# Altium PCB PCB.pcbdoc (part 1 of 2)
Units mil, origin at the board's own origin, x right, y up, seen from the top; angles counter-clockwise.
Board outline 16070 x 6016.88 mil, 4 copper layers (Top Layer, Inner1, Inner2, Bottom Layer); 148 components, 84 nets, 392 pads, 235 vias.
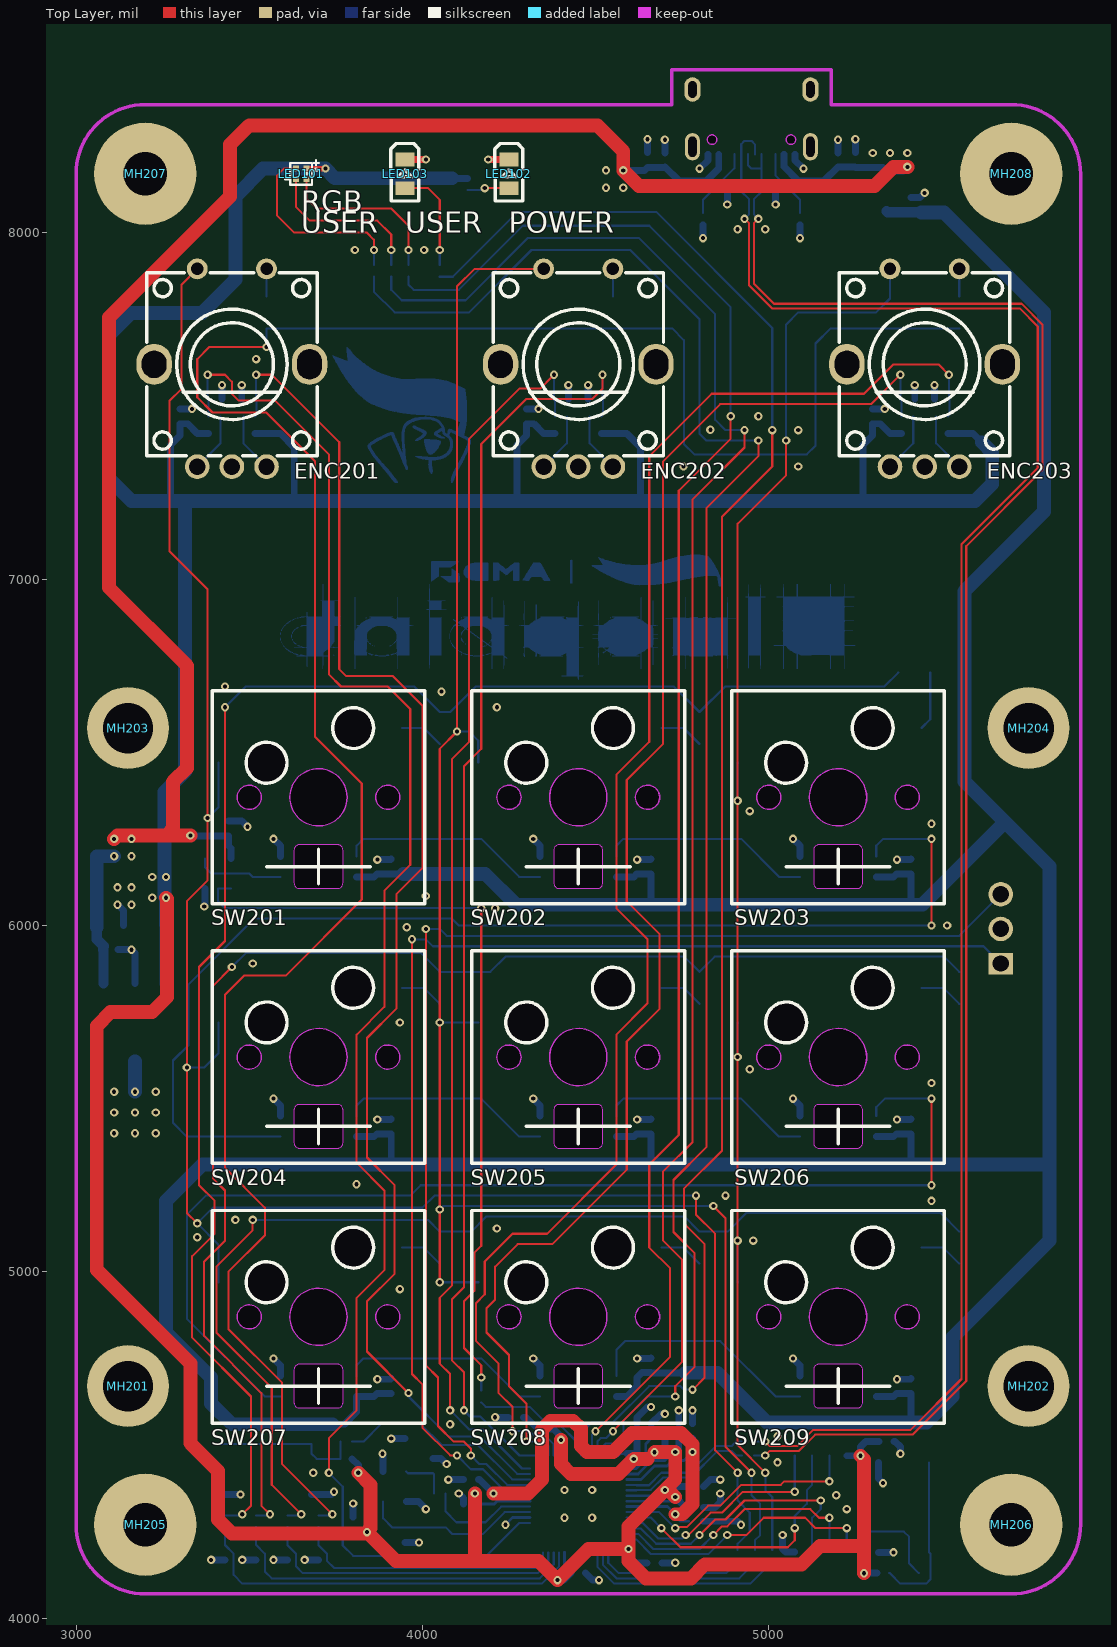
[diagram p0: Top Layer view]
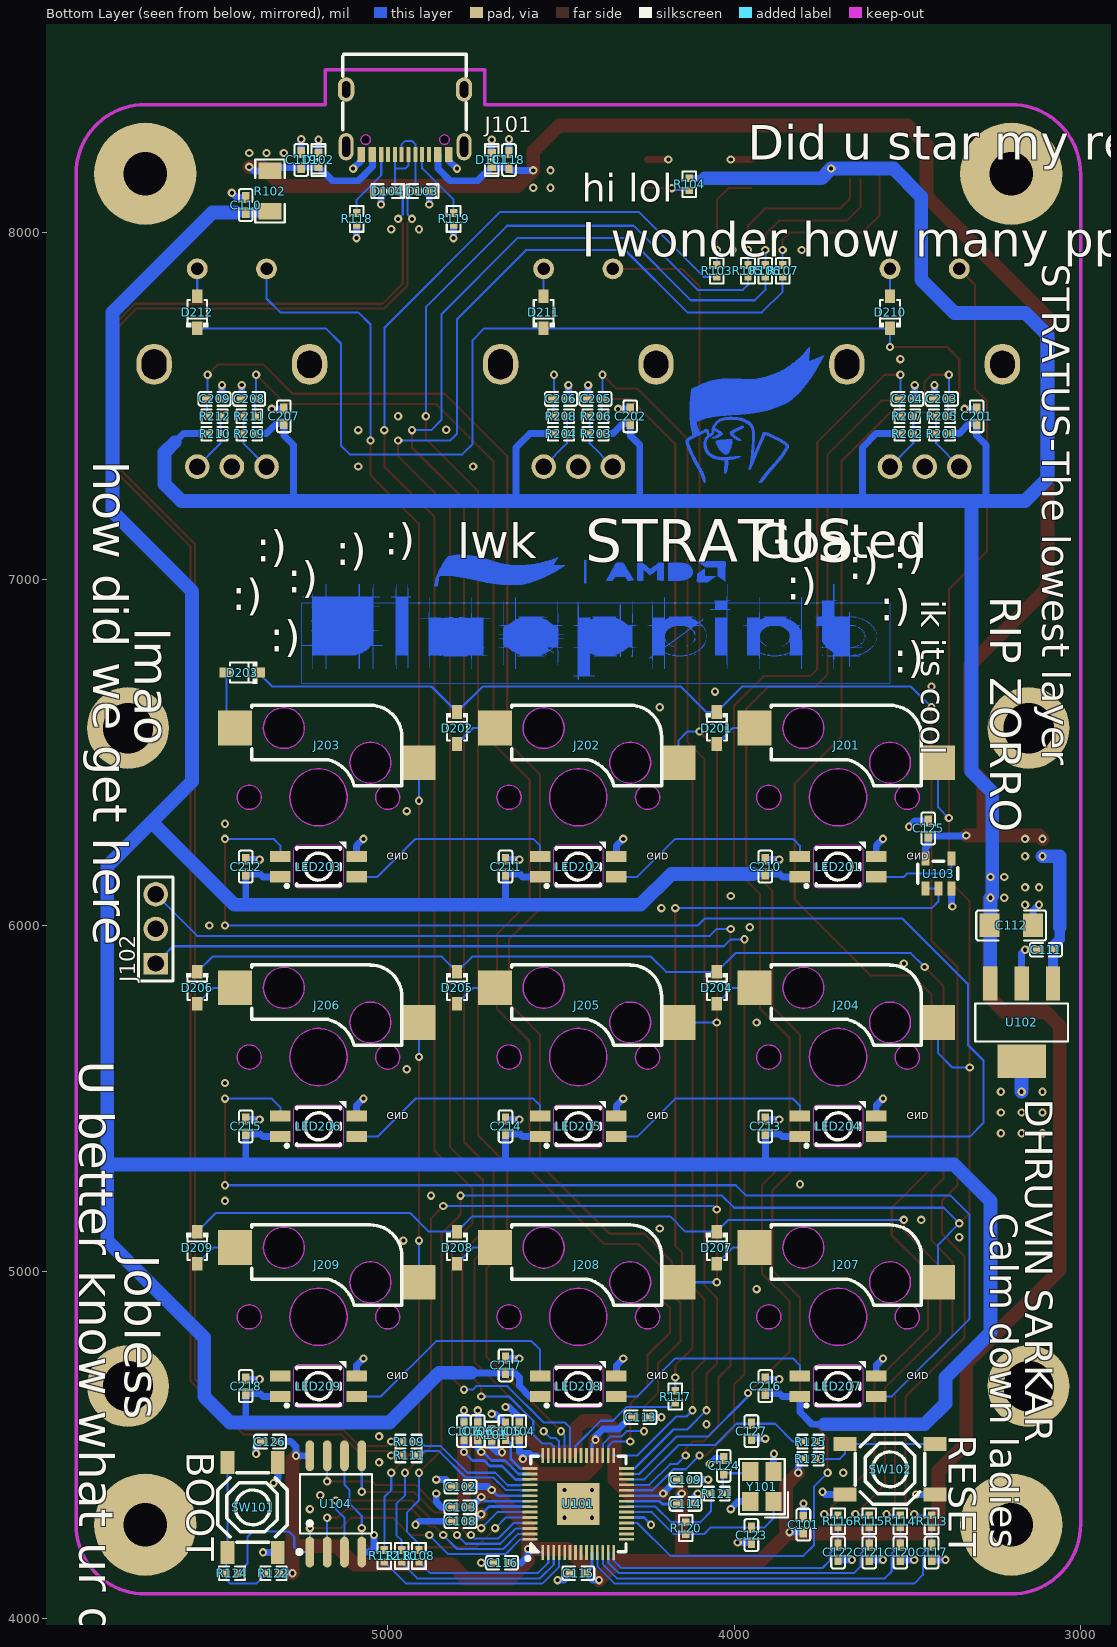
[diagram p1: Bottom Layer view, seen from below]
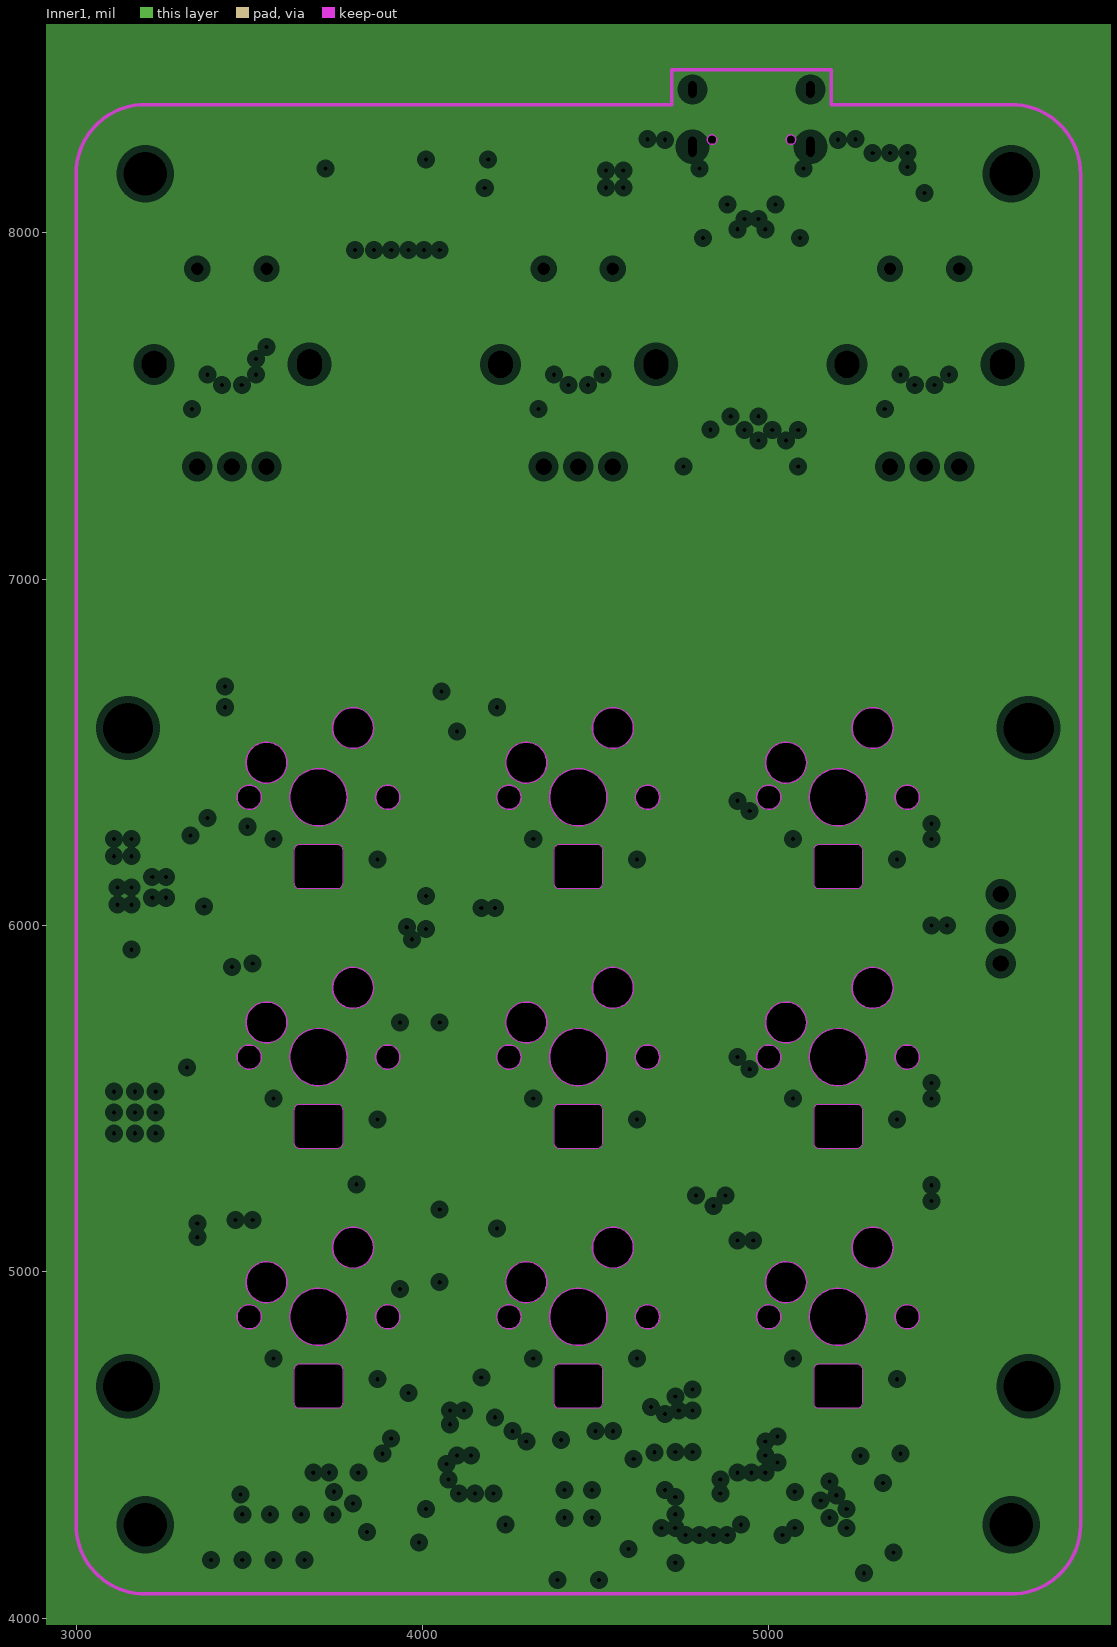
[diagram p2: Inner1, clearances drawn from the general rule]
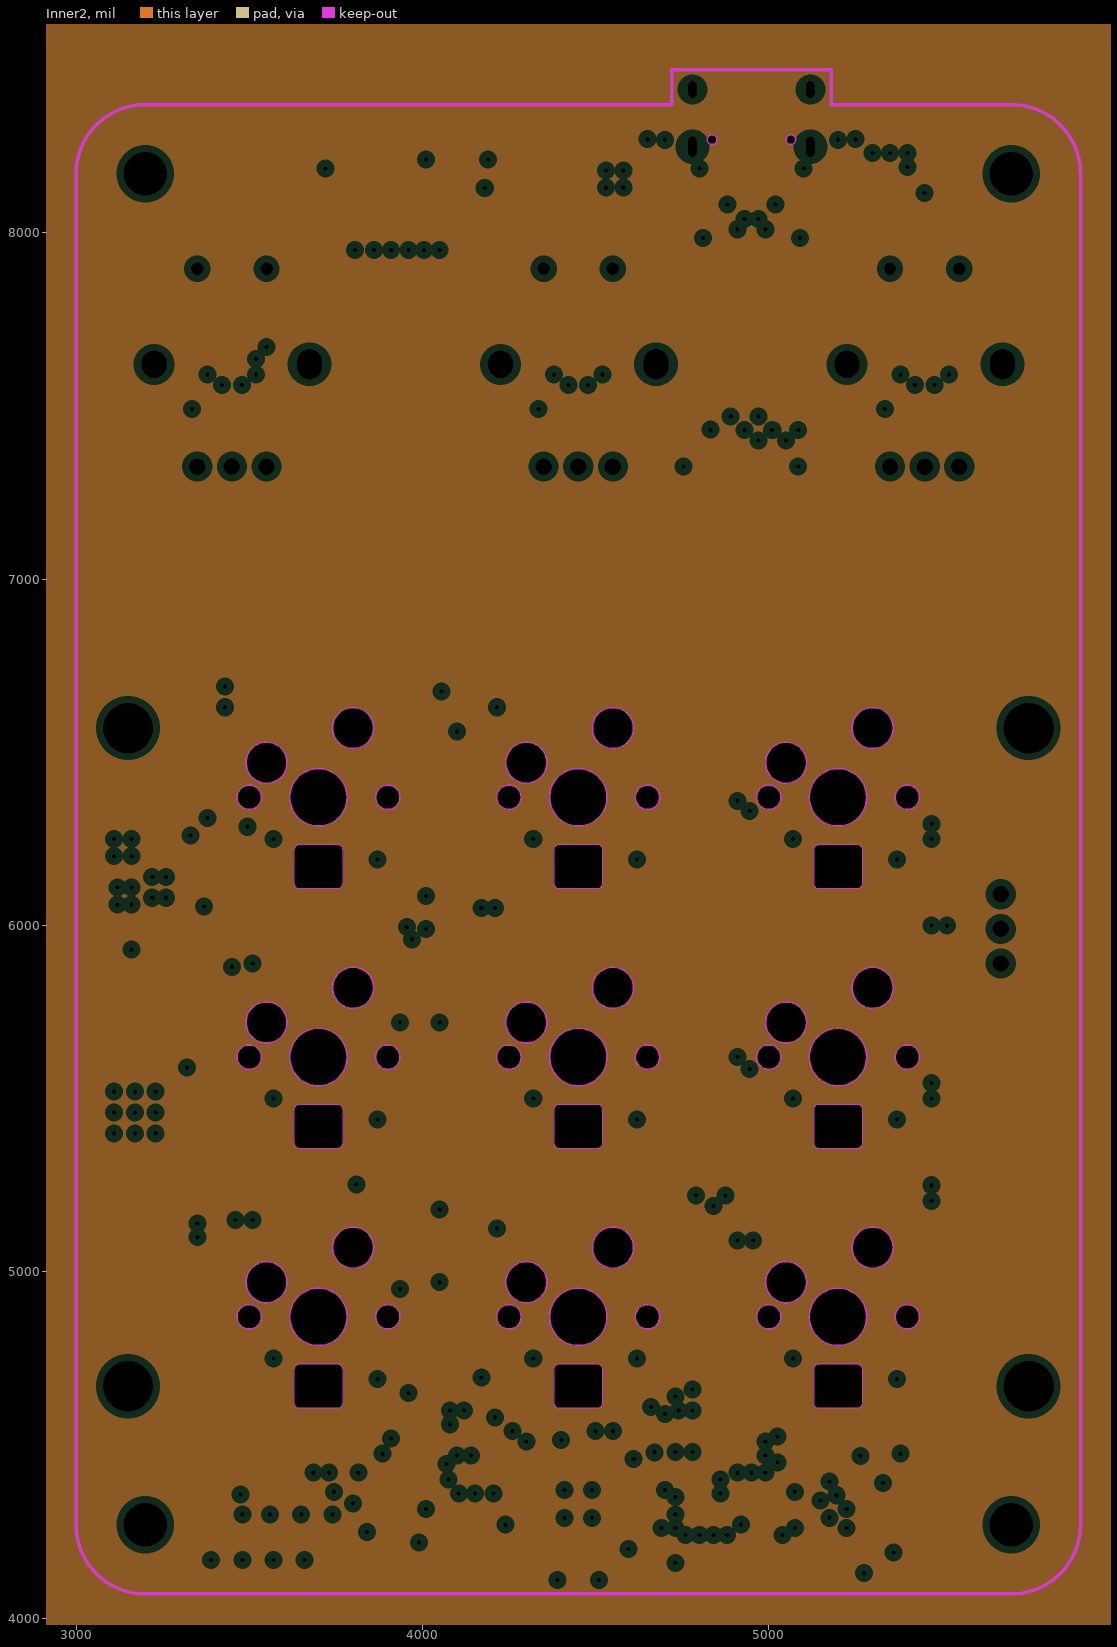
[diagram p3: Inner2, clearances drawn from the general rule]

## Layer stack, top to bottom
Top Layer: signal copper (thickness not stored)
Dielectric: dielectric 12.6, FR-4, Dk 4.8
Inner1: plane copper (thickness not stored)
Dielectric: dielectric 12.6, FR-4, Dk 4.8
Inner2: plane copper (thickness not stored)
Dielectric: dielectric 12.6, FR-4, Dk 4.8
Bottom Layer: signal copper (thickness not stored)

## Board outline
18820,2750 2750,2750 2750,8766.88 18820,8766.88

## Design rules (kind name [scope] priority, off if disabled: settings)
BoardOutlineClearance copperThickness1oz [All] p0: genericclearance=10 ignorepadtopadclearanceinfootprint=FALSE except(0: Arc-SplitContinuation Track-SplitContinuation SMDPad-SplitContinuation THPad-SplitContinuation Via-SplitContinuation Fill-SplitContinuation Poly-SplitContinuation Region-SplitContinuation Text-SplitContinuation; 3: SMDPad-CutoutEdge; 12: Track-OutlineEdge SMDPad-OutlineEdge THPad-OutlineEdge Via-OutlineEdge Fill-OutlineEdge Region-OutlineEdge Poly-OutlineEdge Text-OutlineEdge Track-CutoutEdge THPad-CutoutEdge Via-CutoutEdge Fill-CutoutEdge Region-CutoutEdge)
BoardOutlineClearance copperThickness2oz [All] p0: genericclearance=10 ignorepadtopadclearanceinfootprint=FALSE except(0: Arc-SplitContinuation Track-SplitContinuation SMDPad-SplitContinuation THPad-SplitContinuation Via-SplitContinuation Fill-SplitContinuation Poly-SplitContinuation Region-SplitContinuation Text-SplitContinuation; 6: SMDPad-CutoutEdge THPad-CutoutEdge Via-CutoutEdge Fill-CutoutEdge Region-CutoutEdge; 11.8: Track-OutlineEdge SMDPad-OutlineEdge THPad-OutlineEdge Via-OutlineEdge Fill-OutlineEdge Region-OutlineEdge Poly-OutlineEdge Text-OutlineEdge Track-CutoutEdge)
BoardOutlineClearance copperThicknessInner0.5oz [All] p0: genericclearance=10 ignorepadtopadclearanceinfootprint=FALSE except(0: Arc-SplitContinuation Track-SplitContinuation SMDPad-SplitContinuation THPad-SplitContinuation Via-SplitContinuation Fill-SplitContinuation Poly-SplitContinuation Region-SplitContinuation Text-SplitContinuation; 6: SMDPad-CutoutEdge THPad-CutoutEdge Via-CutoutEdge Fill-CutoutEdge Region-CutoutEdge; 11.8: Track-OutlineEdge SMDPad-OutlineEdge THPad-OutlineEdge Via-OutlineEdge Fill-OutlineEdge Region-OutlineEdge Poly-OutlineEdge Text-OutlineEdge Track-CutoutEdge)
Clearance copperThickness1oz [(InNet('+3V3') OR InNet('GND') OR InNet('+3V3_A') OR InNet('+1V1') OR InNet('+5V_LEDS') OR InNet('+5V_USB') OR InNet('ROW0_R') OR InNet('ROW1_R') OR InNet('ROW2_R') OR InNet('ROW3_R') OR InNet('XIN') OR InNet('X_R') OR InNet('RESET_N') OR InNet('ENC1_A') OR InNet('ENC1_B') OR InNet('ENC2_A') OR InNet('ENC2_B') OR InNet('ENC3_A') OR InNet('ENC3_B') OR InNet('CON_USB_N') OR InNet('CON_USB_P') OR InNet('$2N527') OR InNet('ROW0') OR InNet('$2N632') OR InNet('$2N737') OR InNet('$2N1048') OR InNet('ROW1') OR InNet('$2N1050') OR InNet('$2N1052') OR InNet('$2N1363') OR InNet('ROW2') OR InNet('$2N1365') OR InNet('$2N1367') OR InNet('ENC1_SW') OR InNet('ROW3') OR InNet('ENC2_SW') OR InNet('ENC3_SW') OR InNet('$2N1909') OR InNet('$2N1913') OR InNet('COL0') OR InNet('$2N2803') OR InNet('$2N2807') OR InNet('COL1') OR InNet('$2N3267') OR InNet('$2N3271') OR InNet('COL2') OR InNet('$1N6739') OR InNet('$1N6734') OR InNet('SWDIO') OR InNet('SWCLK') OR InNet('$1N13120') OR InNet('$1N13125') OR InNet('$1N13131') OR InNet('$1N9334') OR InNet('$1N9158') OR InNet('LED1_DIN') OR InNet('LED0_DIN') OR InNet('LED2_DIN') OR InNet('LED3_DIN') OR InNet('LED4_DIN') OR InNet('LED5_DIN') OR InNet('LED6_DIN') OR InNet('LED7_DIN') OR InNet('LED8_DIN') OR InNet('USER_LED1') OR InNet('USER_LED2_R') OR InNet('USER_LED2_G') OR InNet('USER_LED2_B') OR InNet('COL0_R') OR InNet('USB_N') OR InNet('COL1_R') OR InNet('USB_P') OR InNet('COL2_R') OR InNet('LED0_BUF') OR InNet('LED0_RES') OR InNet('XOUT') OR InNet('QSPI_SS') OR InNet('$1N8227') OR InNet('$1N8669') OR InNet('QSPI_SD3') OR InNet('QSPI_SCLK') OR InNet('QSPI_SD0') OR InNet('QSPI_SD2') OR InNet('QSPI_SD1'))] p1: gap=7 ignorepadtopadclearanceinfootprint=FALSE except(3: SMDPad-Region; 12: Track-Region THPad-Region Via-Region Fill-Region Region-Region Region-Poly Region-Text Track-Sheet SMDPad-Sheet THPad-Sheet Via-Sheet Fill-Sheet Region-Sheet Poly-Sheet Text-Sheet Region-Hole Sheet-Hole)
Clearance copperThickness2oz [All] p1: gap=7 ignorepadtopadclearanceinfootprint=FALSE except(6: Track-SMDPad SMDPad-SMDPad Track-THPad SMDPad-THPad THPad-THPad Track-Via SMDPad-Via THPad-Via Via-Via Track-Fill SMDPad-Fill THPad-Fill Via-Fill Fill-Fill SMDPad-Region THPad-Region Via-Region Fill-Region Region-Region Track-Poly SMDPad-Poly THPad-Poly Via-Poly Fill-Poly Poly-Poly Track-Text SMDPad-Text THPad-Text Via-Text Fill-Text Region-Text Poly-Text Text-Text; 6.9: Track-Hole SMDPad-Hole THPad-Hole Via-Hole Fill-Hole Region-Hole Poly-Hole Text-Hole Sheet-Hole; 8: Track-Track; 11.8: Track-Region Region-Poly Track-Sheet SMDPad-Sheet THPad-Sheet Via-Sheet Fill-Sheet Region-Sheet Poly-Sheet Text-Sheet)
Clearance copperThicknessInner0.5oz [All] p1: gap=7 ignorepadtopadclearanceinfootprint=FALSE except(3.5: Track-Track; 6: Track-SMDPad SMDPad-SMDPad Track-THPad SMDPad-THPad THPad-THPad Track-Via SMDPad-Via THPad-Via Via-Via Track-Fill SMDPad-Fill THPad-Fill Via-Fill Fill-Fill SMDPad-Region THPad-Region Via-Region Fill-Region Region-Region Track-Poly SMDPad-Poly THPad-Poly Via-Poly Fill-Poly Poly-Poly Track-Text SMDPad-Text THPad-Text Via-Text Fill-Text Region-Text Poly-Text Text-Text; 6.9: Track-Hole SMDPad-Hole THPad-Hole Via-Hole Fill-Hole Region-Hole Poly-Hole Text-Hole Sheet-Hole; 11.8: Track-Region Region-Poly Track-Sheet SMDPad-Sheet THPad-Sheet Via-Sheet Fill-Sheet Region-Sheet Poly-Sheet Text-Sheet)
DiffPairsRouting differentialPair [All] p1: maxuncoupledlength=15 minlimit=7 maxlimit=7.5 mostfreqgap=7.5 toplayer_minwidth=6.1 toplayer_prefwidth=6.1 toplayer_maxwidth=8 bottomlayer_minwidth=6.1 bottomlayer_prefwidth=6.1 bottomlayer_maxwidth=8
PasteMaskExpansion pasteMaskExpansion [All] p1: expansion=0
PlaneConnect innerPlane [All] p1: planeconnectstyle=Relief reliefexpansion=20 reliefentries=4 reliefconductorwidth=15 reliefairgap=10
PolygonConnect copperRegion [All] p1: connectstyle=Direct reliefentries=4 reliefconductorwidth=10 polygonreliefangle="90 Angle" airgapwidth=10
RoutingVias viaSize [All] p1: viastyle="Through Hole" holewidth=12 minholewidth=12 maxholewidth=248 width=24 minwidth=24 maxwidth=393.7
SolderMaskExpansion solderMaskExpansion [All] p1: useseparateexpansions=TRUE expansion=2 expansionbottom=2
Width copperThickness1oz [All] p1: maxlimit=100 minlimit=6 preferedwidth=8
Width copperThickness2oz [All] p1: maxlimit=100 minlimit=8 preferedwidth=10
Width copperThickness0.5oz [All] p1: maxlimit=100 minlimit=4 preferedwidth=10

## Components (designator, comment, footprint, x,y, rotation, side; value= is the part's Value field where it differs from the comment)
C101 "CL05A225MQ5NSNC" C0402 3800,4270 r270 bottom
C102 "CL05B104KO5NNNC" C0402 4790,4380 r180 bottom
C103 "CL05B104KO5NNNC" C0402 4790,4320 r180 bottom
C104 "CL05B104KO5NNNC" C0402 4620,4540 r270 bottom
C105 "CL05A225MQ5NSNC" C0402 4660,4540 r270 bottom
C106 "CL05A225MQ5NSNC" C0402 4740,4540 r270 bottom
C107 "CL05A225MQ5NSNC" C0402 4780,4540 r270 bottom
C108 "CL05B104KO5NNNC" C0402 4790,4280 r180 bottom
C109 "CL05B104KO5NNNC" C0402 4140,4400 r0 bottom
C110 "CL05A105KA5NQNC" C0402 5410,8080 r270 bottom
C111 "CL05A105KA5NQNC" C0402 3100,5930 r180 bottom
C112 "CL31A476MPHNNNE" C1206 3200,6000 r0 bottom
C113 "CL05B104KO5NNNC" C0402 4270,4580 r0 bottom
C114 "CL05B104KO5NNNC" C0402 4140,4330 r0 bottom
C115 "CL05B104KO5NNNC" C0402 4450,4130 r180 bottom
C116 "CL05B104KO5NNNC" C0402 4670,4160 r180 bottom
C117 "CL05B104KO5NNNC" C0402 3430,4190 r90 bottom
C118 "CL05A105KA5NQNC" C0402 4650,8210 r270 bottom
C119 "CL05A105KA5NQNC" C0402 5250,8210 r270 bottom
C120 "CL05B104KO5NNNC" C0402 3520,4190 r90 bottom
C121 "CL05B104KO5NNNC" C0402 3610,4190 r90 bottom
C122 "CL05B104KO5NNNC" C0402 3700,4190 r90 bottom
C123 "CL05C150JB5NNNC" C0402 3950,4240 r270 bottom
C124 "CL05C150JB5NNNC" C0402 4030,4440 r90 bottom
C125 "CL05B104KO5NNNC" C0402 3440,6280 r270 bottom
C126 "CL05B104KO5NNNC" C0402 5340,4510 r180 bottom
C127 "CL05B104KO5NNNC" C0402 3950,4540 r90 bottom
C201 "CL05A225MQ5NSNC" C0402 3300,7470 r270 bottom
C202 "CL05A225MQ5NSNC" C0402 4300,7470 r270 bottom
C203 "CL05B103KB5NNNC" C0402 3400,7520 r180 bottom
C204 "CL05B103KB5NNNC" C0402 3500,7520 r0 bottom
C205 "CL05B103KB5NNNC" C0402 4400,7520 r180 bottom
C206 "CL05B103KB5NNNC" C0402 4500,7520 r0 bottom
C207 "CL05A225MQ5NSNC" C0402 5300,7470 r270 bottom
C208 "CL05B103KB5NNNC" C0402 5400,7520 r180 bottom
C209 "CL05B103KB5NNNC" C0402 5500,7520 r0 bottom
C210 "CL05B104KO5NNNC" C0402 3910,6170 r270 bottom
C211 "CL05B104KO5NNNC" C0402 4660,6170 r270 bottom
C212 "CL05B104KO5NNNC" C0402 5410,6170 r270 bottom
C213 "CL05B104KO5NNNC" C0402 3910,5420 r270 bottom
C214 "CL05B104KO5NNNC" C0402 4660,5420 r270 bottom
C215 "CL05B104KO5NNNC" C0402 5410,5420 r270 bottom
C216 "CL05B104KO5NNNC" C0402 3910,4670 r270 bottom
C217 "CL05B104KO5NNNC" C0402 4660,4730 r270 bottom
C218 "CL05B104KO5NNNC" C0402 5410,4670 r270 bottom
D101 "GG0402052R542P" D0402-BI 4700,8210 r270 bottom
D102 "GG0402052R542P" D0402-BI 5200,8210 r270 bottom
D103 "GG0402052R542P" D0402-BI 4900,8120 r0 bottom
D104 "GG0402052R542P" D0402-BI 5000,8120 r180 bottom
D201 "1N5819WS_C191023" SOD-323_L1.8-W1.3-LS2.5-RD 4050,6570 r270 bottom
D202 "1N5819WS_C191023" SOD-323_L1.8-W1.3-LS2.5-RD 4800,6570 r270 bottom
D203 "1N5819WS_C191023" SOD-323_L1.8-W1.3-LS2.5-RD 5420,6730 r0 bottom
D204 "1N5819WS_C191023" SOD-323_L1.8-W1.3-LS2.5-RD 4050,5820 r270 bottom
D205 "1N5819WS_C191023" SOD-323_L1.8-W1.3-LS2.5-RD 4800,5820 r270 bottom
D206 "1N5819WS_C191023" SOD-323_L1.8-W1.3-LS2.5-RD 5550,5820 r270 bottom
D207 "1N5819WS_C191023" SOD-323_L1.8-W1.3-LS2.5-RD 4050,5070 r270 bottom
D208 "1N5819WS_C191023" SOD-323_L1.8-W1.3-LS2.5-RD 4800,5070 r270 bottom
D209 "1N5819WS_C191023" SOD-323_L1.8-W1.3-LS2.5-RD 5550,5070 r270 bottom
D210 "1N5819WS_C191023" SOD-323_L1.8-W1.3-LS2.5-RD 3550,7770 r90 bottom
D211 "1N5819WS_C191023" SOD-323_L1.8-W1.3-LS2.5-RD 4550,7770 r90 bottom
D212 "1N5819WS_C191023" SOD-323_L1.8-W1.3-LS2.5-RD 5550,7770 r90 bottom
ENC201 "PEC12R-4120F-S0012_RF_v1.0" SW-TH_PEC12R-4120F-S0012_1 3450,7620 r0 top locked
ENC202 "PEC12R-4120F-S0012_RF_v1.0" SW-TH_PEC12R-4120F-S0012_1 4450,7620 r0 top locked
ENC203 "PEC12R-4120F-S0012_RF_v1.0" SW-TH_PEC12R-4120F-S0012_1 5450,7620 r0 top locked
J101 "TYPE-C 16PIN 2MD(073)" USB-C-SMD_TYPE-C-6PIN-2MD-073 4950,8320 r0 bottom locked
J102 "2.54-1*3P针" HDR-TH_3P-P2.54-V-M-1 5670,5990 r90 bottom locked
J201 "CPG151101S11-16_RF_v1.0" SMD_KEYBOARD-SW_1 3700,6370 r0 bottom locked
J202 "CPG151101S11-16_RF_v1.0" SMD_KEYBOARD-SW_1 4450,6370 r0 bottom locked
J203 "CPG151101S11-16_RF_v1.0" SMD_KEYBOARD-SW_1 5200,6370 r0 bottom locked
J204 "CPG151101S11-16_RF_v1.0" SMD_KEYBOARD-SW_1 3700,5620 r0 bottom locked
J205 "CPG151101S11-16_RF_v1.0" SMD_KEYBOARD-SW_1 4450,5620 r0 bottom locked
J206 "CPG151101S11-16_RF_v1.0" SMD_KEYBOARD-SW_1 5200,5620 r0 bottom locked
J207 "CPG151101S11-16_RF_v1.0" SMD_KEYBOARD-SW_1 3700,4870 r0 bottom locked
J208 "CPG151101S11-16_RF_v1.0" SMD_KEYBOARD-SW_1 4450,4870 r0 bottom locked
J209 "CPG151101S11-16_RF_v1.0" SMD_KEYBOARD-SW_1 5200,4870 r0 bottom locked
LED101 "NH-B1010RGBT-HF_RF_v1.0" LED-ARRAY-SMD_4P-L1.0-W1.0-TR_NH-B1010RGBT_1 3650,8170 r0 top locked
LED102 "KT-0805G" LED0805-R-RD 4250,8170 r270 top locked
LED103 "KT-0805Y" LED0805-R-RD 3950,8170 r270 top locked
LED201 "SK6812MINI-E_C5149201" LED-SMD_L3.2-W2.8-TR 3700,6170 r0 bottom locked
LED202 "SK6812MINI-E_C5149201" LED-SMD_L3.2-W2.8-TR 4450,6170 r0 bottom locked
LED203 "SK6812MINI-E_C5149201" LED-SMD_L3.2-W2.8-TR 5200,6170 r0 bottom locked
LED204 "SK6812MINI-E_C5149201" LED-SMD_L3.2-W2.8-TR 3700,5420 r0 bottom locked
LED205 "SK6812MINI-E_C5149201" LED-SMD_L3.2-W2.8-TR 4450,5420 r0 bottom locked
LED206 "SK6812MINI-E_C5149201" LED-SMD_L3.2-W2.8-TR 5200,5420 r0 bottom locked
LED207 "SK6812MINI-E_C5149201" LED-SMD_L3.2-W2.8-TR 3700,4670 r0 bottom locked
LED208 "SK6812MINI-E_C5149201" LED-SMD_L3.2-W2.8-TR 4450,4670 r0 bottom locked
LED209 "SK6812MINI-E_C5149201" LED-SMD_L3.2-W2.8-TR 5200,4670 r0 bottom locked
MH201 "9774035151R_RF_v1.0" STANDOFF_M2.5x3.5MM_RF_v1.0 3150,4670 r0 top locked
MH202 "9774035151R_RF_v1.0" STANDOFF_M2.5x3.5MM_RF_v1.0 5750,4670 r0 top locked
MH203 "9774035151R_RF_v1.0" STANDOFF_M2.5x3.5MM_RF_v1.0 3150,6570 r0 top locked
MH204 "9774035151R_RF_v1.0" STANDOFF_M2.5x3.5MM_RF_v1.0 5750,6570 r0 top locked
MH205 "MH_7.5X3.2MM_RF_v1.0" MH_7.5X3.2MM_RF_v1.0 3200,4270 r0 top locked
MH206 "MH_7.5X3.2MM_RF_v1.0" MH_7.5X3.2MM_RF_v1.0 5700,4270 r0 top locked
MH207 "MH_7.5X3.2MM_RF_v1.0" MH_7.5X3.2MM_RF_v1.0 3200,8170 r0 top locked
MH208 "MH_7.5X3.2MM_RF_v1.0" MH_7.5X3.2MM_RF_v1.0 5700,8170 r0 top locked
R101 "0402WGF2000TCE" R0402 4700,4530 r90 bottom
R102 "1206W4F100LT5E" R1206 5340,8120 r270 bottom
R103 "0402WGF1001TCE" R0402 4050,7890 r270 bottom
R104 "0402WGF1001TCE" R0402 4130,8140 r90 bottom
R105 "0402WGF1001TCE" R0402 3960,7890 r270 bottom
R106 "0402WGF1001TCE" R0402 3910,7890 r270 bottom
R107 "0402WGF1001TCE" R0402 3860,7890 r270 bottom
R108 "0402WGF270JTCE" R0402 4910,4180 r90 bottom
R109 "0402WGF270JTCE" R0402 4940,4510 r180 bottom
R110 "0402WGF270JTCE" R0402 4960,4180 r90 bottom
R111 "0402WGF270JTCE" R0402 4940,4470 r180 bottom
R112 "0402WGF270JTCE" R0402 5010,4180 r90 bottom
R113 "0402WGF0000TCE" R0402 3430,4280 r90 bottom
R114 "0402WGF0000TCE" R0402 3520,4280 r90 bottom
R115 "0402WGF0000TCE" R0402 3610,4280 r90 bottom
R116 "0402WGF0000TCE" R0402 3700,4280 r90 bottom
R117 "0402WGF270JTCE" R0402 4170,4640 r90 bottom
R118 "0402WGF5101TCE" R0402 5090,8040 r90 bottom
R119 "0402WGF5101TCE" R0402 4810,8040 r90 bottom
R120 "0402WGF1004TCE" R0402 4140,4260 r270 bottom
R121 "0402WGF1001TCE" R0402 4050,4360 r0 bottom
R122 "0402WGF1003TCE" R0402 5330,4130 r180 bottom
R123 "0402WGF1002TCE" R0402 3780,4460 r0 bottom
R124 "0402WGF1001TCE" R0402 5450,4130 r180 bottom
R125 "0402WGF270JTCE" R0402 3780,4510 r0 bottom
R201 "0402WGF1002TCE" R0402 3400,7420 r180 bottom
R202 "0402WGF1002TCE" R0402 3500,7420 r0 bottom
R203 "0402WGF1002TCE" R0402 4400,7420 r180 bottom
R204 "0402WGF1002TCE" R0402 4500,7420 r0 bottom
R205 "0402WGF1002TCE" R0402 3400,7470 r0 bottom
R206 "0402WGF1002TCE" R0402 4400,7470 r0 bottom
R207 "0402WGF1002TCE" R0402 3500,7470 r180 bottom
R208 "0402WGF1002TCE" R0402 4500,7470 r180 bottom
R209 "0402WGF1002TCE" R0402 5400,7420 r180 bottom
R210 "0402WGF1002TCE" R0402 5500,7420 r0 bottom
R211 "0402WGF1002TCE" R0402 5400,7470 r0 bottom
R212 "0402WGF1002TCE" R0402 5500,7470 r180 bottom
SW101 "TS-1187A-B-A-B" SW-SMD_4P-L5.1-W5.1-P3.70-LS6.5-TL-2 5390,4320 r270 bottom
SW102 "TS-1187A-B-A-B" SW-SMD_4P-L5.1-W5.1-P3.70-LS6.5-TL-2 3550,4430 r0 bottom
SW201 "CPG151101S21 RF v1.0" KEY-TH_CPG1511F01S0X_1 3700,6370 r0 top locked
SW202 "CPG151101S21 RF v1.0" KEY-TH_CPG1511F01S0X_1 4450,6370 r0 top locked
SW203 "CPG151101S21 RF v1.0" KEY-TH_CPG1511F01S0X_1 5200,6370 r0 top locked
SW204 "CPG151101S21 RF v1.0" KEY-TH_CPG1511F01S0X_1 3700,5620 r0 top locked
SW205 "CPG151101S21 RF v1.0" KEY-TH_CPG1511F01S0X_1 4450,5620 r0 top locked
SW206 "CPG151101S21 RF v1.0" KEY-TH_CPG1511F01S0X_1 5200,5620 r0 top locked
SW207 "CPG151101S21 RF v1.0" KEY-TH_CPG1511F01S0X_1 3700,4870 r0 top locked
SW208 "CPG151101S21 RF v1.0" KEY-TH_CPG1511F01S0X_1 4450,4870 r0 top locked
SW209 "CPG151101S21 RF v1.0" KEY-TH_CPG1511F01S0X_1 5200,4870 r0 top locked
U101 "RP2040_C2040_RF_v1.0" LQFN-56_L7.0-W7.0-P0.4-EP_1 4450,4330 r90 bottom locked
U102 "LM3940IMP-3.3/NOPB" SOT-223_L6.5-W3.5-P2.30-LS7.0-BR 3170,5720 r90 bottom
U103 "SN74LV1T34DBVR_RF_v1.0" SOT-23-5_L2.9-W1.6-P0.95-LS2.8-BR 3410,6150 r270 bottom
U104 "W25Q128JVSIQ" SOIC-8_L5.3-W5.3-P1.27-LS8.0-BL 5150,4330 r180 bottom
Y101 "ABM8-272-T3_C20625731" CRYSTAL-SMD_4P-L3.2-W2.5-BL 3920,4380 r90 bottom

## Footprints (in the part's own frame and the unit in brackets; to place one, negate y for a bottom-side part, rotate by r counter-clockwise, add the part's x,y. Pads: shape width x height; smd on the part's side, far side on the other; paste and mask are expansions set on the pad)
C0402 [mm]
  rect 0.79x0.54 smd: 1(-0.545,0) 2(0.545,0)
  silkscreen extent -1.17,-0.5 1.17,0.5
C1206 [mm]
  rect 1.485x1.728 smd: 1(-1.593,0) 2(1.593,0)
  silkscreen extent -2.56,-1.09 2.56,1.09
CRYSTAL-SMD_4P-L3.2-W2.5-BL [mm]
  rect 1.4x1.2 smd: 1(-1.1,-0.85) 2(1.1,-0.85) 3(1.1,0.85) 4(-1.1,0.85)
  silkscreen extent -2.26,-1.91 2.03,1.68
D0402-BI [mm]
  rect 0.6x0.6 smd: 1(-0.5,0) 2(0.5,0)
  silkscreen extent -1.18,-0.5 1.17,0.51
HDR-TH_3P-P2.54-V-M-1 [mm]
  rect 1.575x1.8 hole 1.2: 1(-2.54,0)
  round 1.8 hole 1.2: 2(0,0) 3(2.54,0)
  silkscreen extent -3.81,-1.27 3.81,1.27
KEY-TH_CPG1511F01S0X_1 [mil]
  Board Outline Layer circle w1: c0,0 r82.68
  Board Outline Layer circle w1: c-200,0 r35
  Board Outline Layer circle w1: c200,0 r35
  Board Outline Layer region: 82.68,0 74.49,-35.87 51.55,-64.64 18.4,-80.6 -18.4,-80.6 -51.55,-64.64 -74.49,-35.87 -82.68,0 -82.68,0 -74.49,35.87 -51.55,64.64 -18.4,80.6 18.4,80.6 51.55,64.64 74.49,35.87 82.68,0
  Board Outline Layer region: -165,0 -168.47,-15.19 -178.18,-27.36 -192.21,-34.12 -207.79,-34.12 -221.82,-27.36 -231.53,-15.19 -235,0 -235,0 -231.53,15.19 -221.82,27.36 -207.79,34.12 -192.21,34.12 -178.18,27.36 -168.47,15.19 -165,0
  Board Outline Layer region: 235,0 231.53,-15.19 221.82,-27.36 207.79,-34.12 192.21,-34.12 178.18,-27.36 168.47,-15.19 165,0 165,0 168.47,15.19 178.18,27.36 192.21,34.12 207.79,34.12 221.82,27.36 231.53,15.19 235,0
  Multi-Layer board cut-out: 82.68,0 74.49,-35.87 51.55,-64.64 18.4,-80.6 -18.4,-80.6 -51.55,-64.64 -74.49,-35.87 -82.68,0 -82.68,0 -74.49,35.87 -51.55,64.64 -18.4,80.6 18.4,80.6 51.55,64.64 74.49,35.87 82.68,0
  Multi-Layer board cut-out: -165,0 -168.47,-15.19 -178.18,-27.36 -192.21,-34.12 -207.79,-34.12 -221.82,-27.36 -231.53,-15.19 -235,0 -235,0 -231.53,15.19 -221.82,27.36 -207.79,34.12 -192.21,34.12 -178.18,27.36 -168.47,15.19 -165,0
  Multi-Layer board cut-out: 235,0 231.53,-15.19 221.82,-27.36 207.79,-34.12 192.21,-34.12 178.18,-27.36 168.47,-15.19 165,0 165,0 168.47,15.19 178.18,27.36 192.21,34.12 207.79,34.12 221.82,27.36 231.53,15.19 235,0
  silkscreen extent -307,-307 307,307
LED0805-R-RD [mm]
  rect 1x1.4 smd: 1(1.05,0) 2(-1.05,0)
  silkscreen extent -2.22,-1.04 1.99,1.01
LED-ARRAY-SMD_4P-L1.0-W1.0-TR_NH-B1010RGBT_1 [mm]
  rect 0.45x0.45 smd: 1(0.385,0.385) 2(0.385,-0.385) 3(-0.385,-0.385) 4(-0.385,0.385)
  silkscreen extent -1.2,-0.8 1.3,1
LED-SMD_L3.2-W2.8-TR [mm]
  rect 1.5x0.82 smd: 1(2.8,0.75) 2(2.8,-0.75) 3(-2.8,-0.75) 4(-2.8,0.75)
  Board Outline Layer lines w0.005: -1.8,-1.2 ccw(c-1.4,-1.2) -1.406,-1.6 ccw(c-1.413,-1.2) -1.4,-1.6 1.4,-1.6 ; -1.8,-1.2 -1.8,-1.2 ; -1.8,-1.2 -1.8,-1.2 ; -1.8,-1.2 -1.8,1.2 cw(c-1.4,1.2) -1.4,1.6 1.4,1.6 ; 1.4,1.6 1.4,1.6 ; 1.4,1.6 cw(c1.4,1.2) 1.8,1.2 1.8,-1.2 cw(c1.4,-1.2) 1.4,-1.6 ; 1.4,-1.6 1.4,-1.6
  Board Outline Layer region: 1.8,-1.2 1.746,-1.4 1.6,-1.547 1.4,-1.6 1.4,-1.6 1.4,-1.6 -1.4,-1.6 -1.403,-1.6 -1.406,-1.6 -1.406,-1.6 -1.604,-1.545 -1.747,-1.398 -1.8,-1.2 -1.8,-1.2 -1.8,-1.2 -1.8,-1.2 -1.8,-1.2 -1.8,-1.2 -1.8,1.2 -1.746,1.4 -1.6,1.546 -1.4,1.6 -1.4,1.6 1.4,1.6 1.4,1.6 1.6,1.547 1.746,1.4 1.8,1.2 1.8,1.2
  Multi-Layer board cut-out: 1.8,-1.2 1.746,-1.4 1.6,-1.547 1.4,-1.6 1.4,-1.6 1.4,-1.6 -1.4,-1.6 -1.403,-1.6 -1.406,-1.6 -1.406,-1.6 -1.604,-1.545 -1.747,-1.398 -1.8,-1.2 -1.8,-1.2 -1.8,-1.2 -1.8,-1.2 -1.8,-1.2 -1.8,-1.2 -1.8,1.2 -1.746,1.4 -1.6,1.546 -1.4,1.6 -1.4,1.6 1.4,1.6 1.4,1.6 1.6,1.547 1.746,1.4 1.8,1.2 1.8,1.2
  silkscreen extent -2.03,-1.83 2.42,1.52
LQFN-56_L7.0-W7.0-P0.4-EP_1 [mm]
  rect 1.1x0.2 smd: 1(-3.55,2.6) 2(-3.55,2.2) 3(-3.55,1.8) 4(-3.55,1.4) 5(-3.55,1) 6(-3.55,0.6) 7(-3.55,0.2) 8(-3.55,-0.2) 9(-3.55,-0.6) 10(-3.55,-1) 11(-3.55,-1.4) 12(-3.55,-1.8) 13(-3.55,-2.2) 14(-3.55,-2.6) 29(3.55,-2.6) 30(3.55,-2.2) 31(3.55,-1.8) 32(3.55,-1.4) 33(3.55,-1) 34(3.55,-0.6) 35(3.55,-0.2) 36(3.55,0.2) 37(3.55,0.6) 38(3.55,1) 39(3.55,1.4) 40(3.55,1.8) 41(3.55,2.2) 42(3.55,2.6)
  rect 0.2x1.1 smd: 15(-2.6,-3.55) 16(-2.2,-3.55) 17(-1.8,-3.55) 18(-1.4,-3.55) 19(-1,-3.55) 20(-0.6,-3.55) 21(-0.2,-3.55) 22(0.2,-3.55) 23(0.6,-3.55) 24(1,-3.55) 25(1.4,-3.55) 26(1.8,-3.55) 27(2.2,-3.55) 28(2.6,-3.55) 43(2.6,3.55) 44(2.2,3.55) 45(1.8,3.55) 46(1.4,3.55) 47(1,3.55) 48(0.6,3.55) 49(0.2,3.55) 50(-0.2,3.55) 51(-0.6,3.55) 52(-1,3.55) 53(-1.4,3.55) 54(-1.8,3.55) 55(-2.2,3.55) 56(-2.6,3.55)
  rect 3.1x3.1 smd: 57(0,0)
  silkscreen extent -4.13,-3.5 3.5,3.83
MH_7.5X3.2MM_RF_v1.0 [mm]
  round 7.5 hole 3.2: 1(0,0)
R0402 [mm]
  rect 0.566x0.54 smd: 1(-0.433,0) 2(0.433,0)
  silkscreen extent -0.94,-0.5 0.94,0.5
R1206 [mil]
  rect 47.54x66.97 smd: 1(-58.22,0) 2(58.22,0)
  silkscreen extent -91,-42 91,42
SMD_KEYBOARD-SW_1 [mm]
  rect 2.5x2.55 smd: 1(-7.335,-2.54) 2(6.115,-5.08)
  Board Outline Layer circle w0.025: c-3.809,-2.54 r1.5
  Board Outline Layer circle w0.025: c2.54,-5.08 r1.5
  Board Outline Layer region: -2.309,-2.54 -2.458,-1.889 -2.874,-1.367 -3.476,-1.078 -4.143,-1.078 -4.745,-1.367 -5.161,-1.889 -5.309,-2.54 -5.309,-2.54 -5.161,-3.191 -4.745,-3.713 -4.143,-4.002 -3.476,-4.002 -2.874,-3.713 -2.458,-3.191 -2.309,-2.54
  Board Outline Layer region: 4.04,-5.08 3.891,-4.429 3.475,-3.907 2.874,-3.618 2.206,-3.618 1.605,-3.907 1.189,-4.429 1.04,-5.08 1.04,-5.08 1.189,-5.731 1.605,-6.253 2.206,-6.542 2.874,-6.542 3.475,-6.253 3.891,-5.731 4.04,-5.08
  Multi-Layer board cut-out: -2.309,-2.54 -2.458,-1.889 -2.874,-1.367 -3.476,-1.078 -4.143,-1.078 -4.745,-1.367 -5.161,-1.889 -5.309,-2.54 -5.309,-2.54 -5.161,-3.191 -4.745,-3.713 -4.143,-4.002 -3.476,-4.002 -2.874,-3.713 -2.458,-3.191 -2.309,-2.54
  Multi-Layer board cut-out: 4.04,-5.08 3.891,-4.429 3.475,-3.907 2.874,-3.618 2.206,-3.618 1.605,-3.907 1.189,-4.429 1.04,-5.08 1.04,-5.08 1.189,-5.731 1.605,-6.253 2.206,-6.542 2.874,-6.542 3.475,-6.253 3.891,-5.731 4.04,-5.08
  silkscreen extent -6.11,-6.76 4.89,-0.86
SOD-323_L1.8-W1.3-LS2.5-RD [mm]
  rect 1x0.75 smd: 1(-1.173,0) 2(1.173,0)
  silkscreen extent -1.08,-0.8 0.9,0.8
SOIC-8_L5.3-W5.3-P1.27-LS8.0-BL [mm]
  oval 0.63x2.25 smd: 1(-1.905,-3.53) 2(-0.635,-3.53) 3(0.635,-3.53) 4(1.905,-3.53) 5(1.905,3.53) 6(0.635,3.53) 7(-0.635,3.53) 8(-1.905,3.53)
  silkscreen extent -2.82,-3.68 2.64,2.18
SOT-23-5_L2.9-W1.6-P0.95-LS2.8-BR [mm]
  rect 1x0.6 smd: 1(1.1,-0.95) 2(1.1,0) 3(1.1,0.95) 4(-1.1,0.95) 5(-1.1,-0.95)
  silkscreen extent -0.89,-1.52 0.7,1.4
SOT-223_L6.5-W3.5-P2.30-LS7.0-BR [mm]
  rect 2.465x1.05 smd: 1(2.857,-2.3) 2(2.857,0) 3(2.857,2.3)
  rect 2.465x3.54 smd: 4(-2.857,0)
  silkscreen extent -1.4,-3.4 1.4,3.4
STANDOFF_M2.5x3.5MM_RF_v1.0 [mm]
  round 6 hole 3.7: 1(0,0)
SW-SMD_4P-L5.1-W5.1-P3.70-LS6.5-TL-2 [mm]
  rect 1.7x1 smd: 1(-3.3,1.85) 2(3.3,1.85) 3(-3.3,-1.85) 4(3.3,-1.85)
  silkscreen extent -2.55,-2.55 2.55,2.55
SW-TH_PEC12R-4120F-S0012_1 [mm]
  round 1.524 hole 0.914: 1(-2.54,7.001) 2(2.54,7.001)
  oval 2.6x3 hole 1.8 slot 2.2 at 90 deg: 3(5.7,0.001)
  oval 2.6x3 hole 1.8 slot 2 at 90 deg: 4(-5.7,0.001)
  round 1.8 hole 1.2: A(-2.54,-7.499) B(2.54,-7.499) C(0,-7.499)
  silkscreen extent -6.25,-6.7 6.25,6.7
USB-C-SMD_TYPE-C-6PIN-2MD-073 [mm]
  rect 0.55x1.1 smd: 1(-3.2,2.375) 2(-2.4,2.375) 11(2.4,2.375) 12(3.2,2.375)
  rect 0.3x1.1 smd: 3(-1.75,2.375) 4(-1.25,2.375) 5(-0.75,2.375) 6(-0.25,2.375) 7(0.25,2.375) 8(0.75,2.375) 9(1.25,2.375) 10(1.75,2.375)
  oval 1.2x1.8 hole 0.6 slot 1.2 at 90 deg: 13(-4.325,-2.375) 14(4.325,-2.375)
  oval 1.1x2 hole 0.6 slot 1.5 at 90 deg: 13(-4.325,1.825) 14(4.325,1.825)
  Board Outline Layer circle w0.005: c-2.89,1.305 r0.35
  Board Outline Layer circle w0.005: c2.89,1.305 r0.35
  Board Outline Layer region: -2.54,1.305 -2.575,1.457 -2.672,1.579 -2.812,1.646 -2.968,1.646 -3.108,1.579 -3.205,1.457 -3.24,1.305 -3.24,1.305 -3.205,1.153 -3.108,1.031 -2.968,0.964 -2.812,0.964 -2.672,1.031 -2.575,1.153 -2.54,1.305
  Board Outline Layer region: 3.24,1.305 3.205,1.457 3.108,1.579 2.968,1.646 2.812,1.646 2.672,1.579 2.575,1.457 2.54,1.305 2.54,1.305 2.575,1.153 2.672,1.031 2.812,0.964 2.968,0.964 3.108,1.031 3.205,1.153 3.24,1.305
  Multi-Layer board cut-out: -2.54,1.305 -2.575,1.457 -2.672,1.579 -2.812,1.646 -2.968,1.646 -3.108,1.579 -3.205,1.457 -3.24,1.305 -3.24,1.305 -3.205,1.153 -3.108,1.031 -2.968,0.964 -2.812,0.964 -2.672,1.031 -2.575,1.153 -2.54,1.305
  Multi-Layer board cut-out: 3.24,1.305 3.205,1.457 3.108,1.579 2.968,1.646 2.812,1.646 2.672,1.579 2.575,1.457 2.54,1.305 2.54,1.305 2.575,1.153 2.672,1.031 2.812,0.964 2.968,0.964 3.108,1.031 3.205,1.153 3.24,1.305
  silkscreen extent -4.5,-4.97 4.57,0.6

## Via types
v1: diameter 24, hole 12, Top Layer to Bottom Layer, 235 vias

## Nets (pads, with @x,y where several pads share a name; then routed paths per layer and width w, separated by ;. In a path a pad name is that pad's centre, name@x,y a point inside that pad or via, vN(x,y) a via of type N, cw(c..) or ccw(c..) an arc to the next point about the centre after c; other vN are vias at no path point)
$1N6734: J101.10 R118.2 | length 198.9
  Bottom Layer w6: J101.10@5018.9,8226.5 5018.9,8166.1 5090,8095 R118.2@5090,8057.04
$1N6739: J101.4 R119.2 | length 207.1
  Bottom Layer w6: R119.2@4810,8057.04 4810,8095 4900.8,8185.8 J101.4@4900.8,8226.5
$1N8227: R122.1 R124.1 SW101.3 SW101.4 | length 477
  Bottom Layer w6: R122.1@5347.04,4130 5350,4130 5380,4100 5455,4100 5467.04,4112.04 R124.1@5467.04,4130 5467.04,4185.88 SW101.4@5462.84,4190.08 SW101.3@5462.84,4449.92
$1N8669: R123.1 R125.1 SW102.3 SW102.4 | length 426.9
  Bottom Layer w6: SW102.3@3420.08,4502.84 SW102.4@3679.92,4502.84 3679.92,4475.08 3695,4460 R123.1@3762.96,4460 R125.1@3762.96,4510
$1N9158: LED103.1 R103.1 | length 301.9
  Top Layer w6: LED103.1@3950,8128.65 4016.35,8128.65 4050,8095 v1(4050,7950)
  Bottom Layer w6: R103.1@4050,7907.04 v1(4050,7950)
$1N9334: LED102.1 R104.1 | length 122.9
  Top Layer w6: v1(4180,8128.65) LED102.1@4250,8128.65
  Bottom Layer w6: R104.1@4130,8122.96 4172.96,8122.96 v1@4180,8130
$1N13120: LED101.2 R105.1 | length 495.9
  Top Layer w6: LED101.2@3665.16,8154.84 3665.16,8099.84 3695,8070 3910,8070 3960,8020 v1(3960,7950)
  Bottom Layer w6: R105.1@3960,7907.04 v1(3960,7950)
$1N13125: LED101.3 R106.1 | length 476
  Top Layer w6: LED101.3@3634.84,8154.84 3634.84,8075.16 3675,8035 3870,8035 3910,7995 v1(3910,7950)
  Bottom Layer w6: R106.1@3910,7907.04 v1(3910,7950)
$1N13131: LED101.4 R107.1 | length 560.1
  Top Layer w6: LED101.4@3634.84,8185.16 3634.68,8185 3600,8185 3580,8165 3580,8050 3630,8000 3840,8000 3860,7980 v1(3860,7950)
  Bottom Layer w6: R107.1@3860,7907.04 v1(3860,7950)
$2N527: D201.2 J201.2 | length 128.4
  Bottom Layer w6: J201.2@3940.76,6570 4003.84,6570 D201.2@4050,6523.84
$2N632: D202.2 J202.2 | length 128.4
  Bottom Layer w6: J202.2@4690.76,6570 4753.84,6570 D202.2@4800,6523.84
$2N737: D203.2 J203.2 | length 170.5
  Bottom Layer w6: J203.2@5440.76,6570 5466.16,6595.4 D203.2@5466.16,6730
$2N1048: D204.2 J204.2 | length 128.4
  Bottom Layer w6: J204.2@3940.76,5820 4003.84,5820 D204.2@4050,5773.84
$2N1050: D205.2 J205.2 | length 128.4
  Bottom Layer w6: J205.2@4690.76,5820 4753.84,5820 D205.2@4800,5773.84
$2N1052: D206.2 J206.2 | length 128.4
  Bottom Layer w6: J206.2@5440.76,5820 5503.84,5820 D206.2@5550,5773.84
$2N1363: D207.2 J207.2 | length 128.4
  Bottom Layer w6: J207.2@3940.76,5070 4003.84,5070 D207.2@4050,5023.84
$2N1365: D208.2 J208.2 | length 128.4
  Bottom Layer w6: J208.2@4690.76,5070 4753.84,5070 D208.2@4800,5023.84
$2N1367: D209.2 J209.2 | length 128.4
  Bottom Layer w6: J209.2@5440.76,5070 5503.84,5070 D209.2@5550,5023.84
$2N1909: ENC201.A R201.1 R205.2 | length 173
  Bottom Layer w6: ENC201.A@3350,7324.77 3417.04,7391.81 R201.1@3417.04,7420 R205.2@3417.04,7470
$2N1913: ENC201.B R202.1 R207.2 | length 173
  Bottom Layer w6: R207.2@3482.96,7470 R202.1@3482.96,7420 3482.96,7391.81 ENC201.B@3550,7324.77
$2N2803: ENC202.A R203.1 R206.2 | length 173
  Bottom Layer w6: ENC202.A@4350,7324.77 4417.04,7391.81 R203.1@4417.04,7420 R206.2@4417.04,7470
$2N2807: ENC202.B R204.1 R208.2 | length 173
  Bottom Layer w6: R208.2@4482.96,7470 R204.1@4482.96,7420 4482.96,7391.81 ENC202.B@4550,7324.77
$2N3267: ENC203.A R209.1 R211.2 | length 173
  Bottom Layer w6: ENC203.A@5350,7324.77 5417.04,7391.81 R209.1@5417.04,7420 R211.2@5417.04,7470
$2N3271: ENC203.B R210.1 R212.2 | length 173
  Bottom Layer w6: R212.2@5482.96,7470 R210.1@5482.96,7420 5482.96,7391.81 ENC203.B@5550,7324.77
+1V1: C107.2 C108.2 C109.2 U101.23 U101.45 U101.50 | length 1713.2
  Top Layer w40: v1(4205,4360) 4305,4360 4345,4400 4345,4545 4370,4570 4435,4570 4457.5,4547.5 4457.5,4497.5 4475,4480 4550,4480 4605,4535 4747.18,4535 4780,4502.18 v1(4780,4480) 4780,4330 4750,4300 v1(4730,4300)
  Bottom Layer w8.1: v1(4205,4360) 4211.38,4353.62 U101.23@4310.23,4353.62 ; U101.50@4589.77,4322.12 4707.88,4322.12 v1(4730,4300) 4730,4295 4745,4280 C108.2@4768.54,4280 ; U101.45@4589.77,4400.86 4630.86,4400.86 4669.9,4439.9 4706.25,4439.9 4721.35,4455 4755,4455 v1(4780,4480)
  Bottom Layer w20: C109.2@4161.46,4400 4165,4400 v1(4205,4360) ; v1(4780,4480) C107.2@4780,4518.54